# EAGLE board switch (EAGLE 7.6.0)

Size 57.13 x 28.88 mm. Coordinates in mm from the lower left corner, seen from the top.
Outline: 0,0 57.13,0 57.13,28.88 0,28.88 0,0
Copper layers (1*16): Top 0.035mm / dielectric 1.5mm / Bottom 0.035mm
Design rules "default": minimum track width 10mil, minimum drill 24mil, track to track 8mil, track to pad 8mil, pad to pad 8mil, via to via 8mil, smd to smd 8mil, copper to edge 40mil, drill to drill 8mil, minimum pad ring 10mil, minimum via ring 8mil, stop-mask expansion 4mil, vias tented up to drill 0mil, thermal gap 10mil

## Footprints (pad centres in the part's own frame; a part is rotated, then mirrored left to right if it is on the bottom)
TL3XPO = drill 1.1 pad 1.422 long: 1 -2.54,0; 2 0,0; 3 2.54,0
SWITCH_SPDT_PTH_11.6X4.0MM = drill 1.016 pad 1.88: 1 0,2.54; 2 0,0; 3 0,-2.54

## Placement (x,y rotation side)
S1  TL36PO  [TL3XPO]  45.72,16.51 0 top
S2  TL37PO  [TL3XPO]  11.43,16.51 0 top
S3  [SWITCH_SPDT_PTH_11.6X4.0MM]  26.67,16.51 90 top

## Library data of the parts
S1 S2 = switch
S3 = SparkFun-Switches; PROD_ID: SWCH-08261; SF_SKU: COM-00102

## Tracks (layer width: path | path; a pad name or v marks a point on that pad's centre or on a via)
(copper drawn outside any net)
  shapes: Bottom area x1